# EAGLE board ms_auth_breakout (EAGLE 6.5.0)
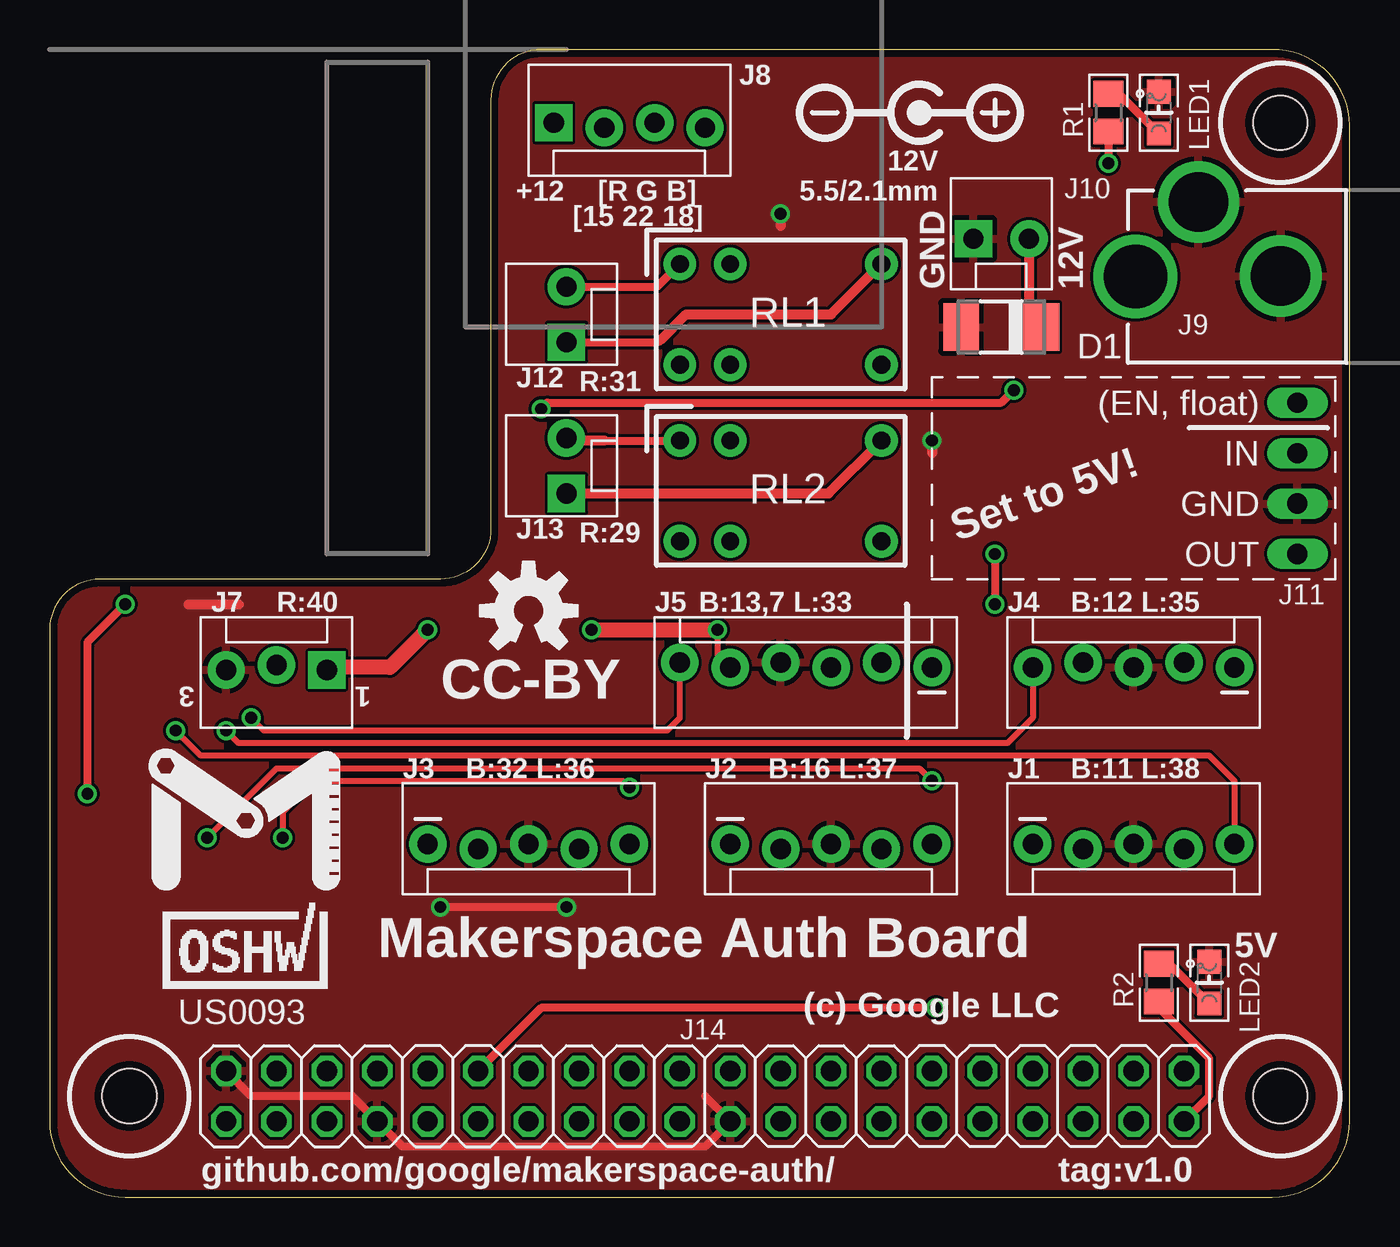
[diagram p0: board, top side]
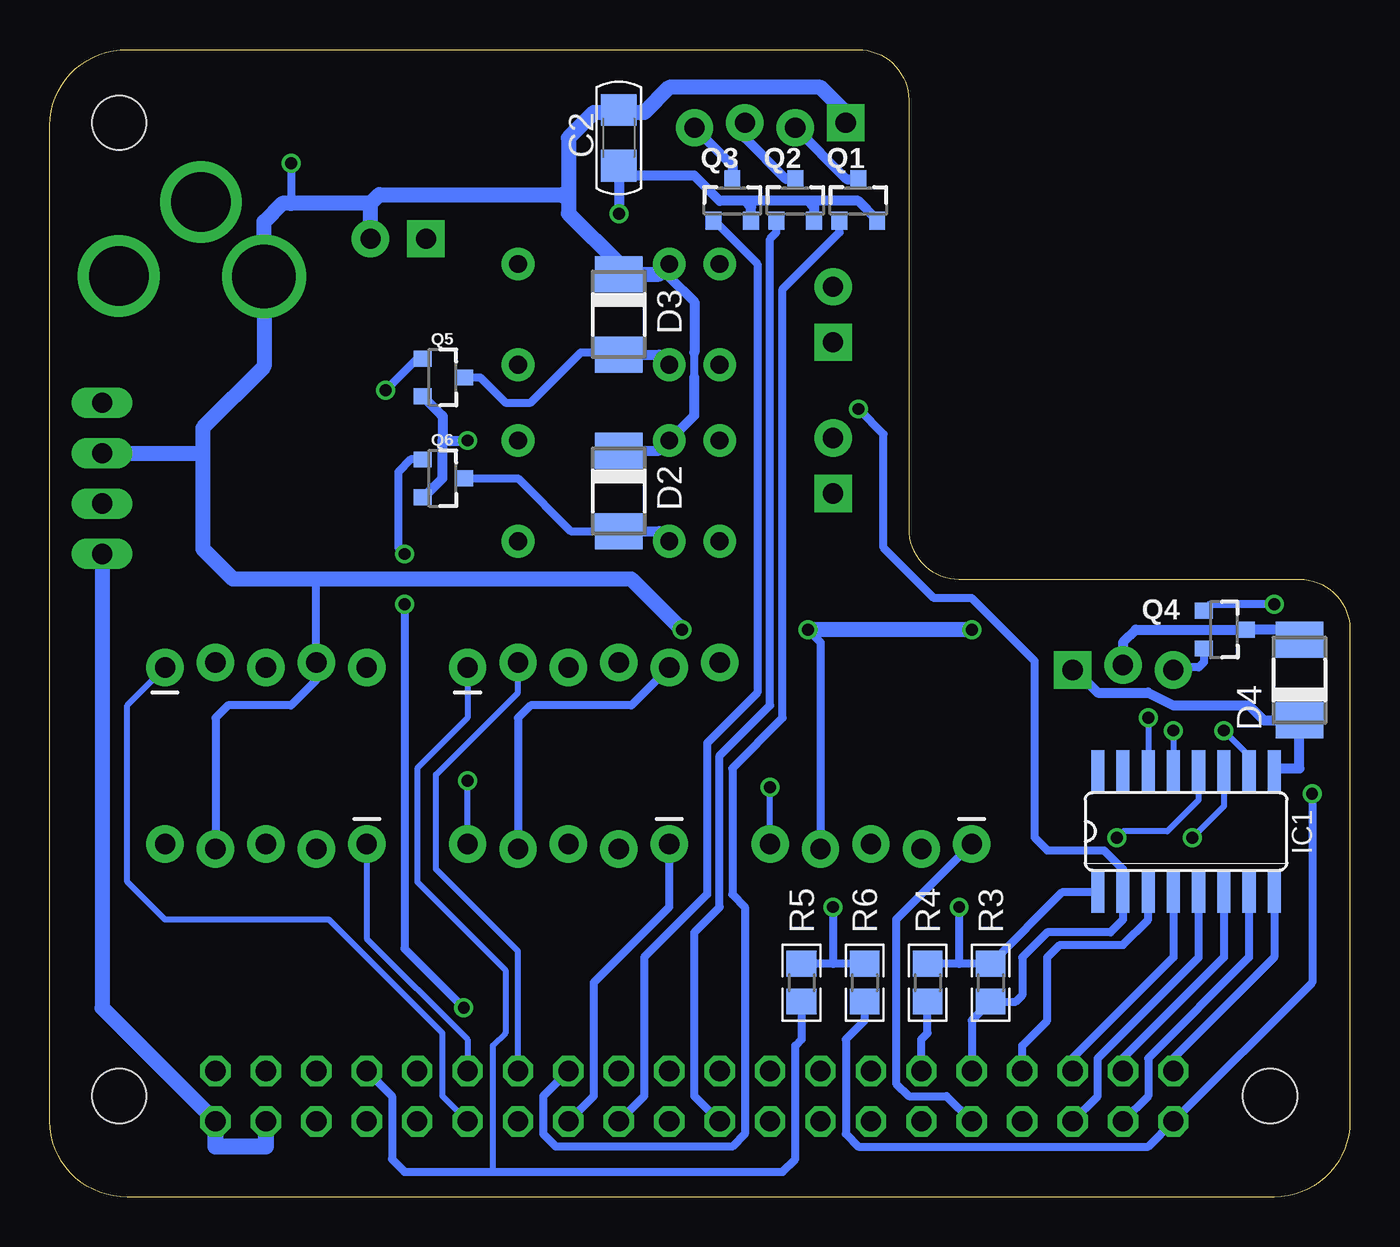
[diagram p1: board, bottom side, seen from below]

Size 65.51 x 57.78 mm. Coordinates in mm from the lower left corner, seen from the top.
Outline: 0,3.81 arc90 3.81,0 61.59,0 arc90 65.51,3.81 65.51,53.98 arc90 61.59,57.78 24.77,57.78 arc90 22.23,55.24 22.23,33.66 arc-90 19.68,31.11 2.54,31.11 arc90 0,28.57 0,3.81
Copper layers (1*16): Top 0.0356mm / dielectric 1.5011mm / Bottom 0.0356mm
Design rules "LaenPCBOrder": minimum track width 6mil, minimum drill 13mil, track to track 6mil, track to pad 6mil, pad to pad 6mil, via to via 6mil, smd to smd 6mil, copper to edge 15mil, drill to drill 6mil, minimum pad ring 7mil, minimum via ring 7mil, stop-mask expansion 4mil, vias tented up to drill 0mil, thermal gap 10mil
Holes 2.74 mm at 62,5.08 4.01,5.08 62,54.1

## Footprints (pad centres in the part's own frame; a part is rotated, then mirrored left to right if it is on the bottom)
C1206 = smd 1.6 x 1.8: 1 -1.4,0; 2 1.4,0
DO-214AC = smd 1.8 x 2.4: A 2.025,0; C -2.025,0
SO16 = smd 0.66 x 2.032: 1 -4.445,-3.073; 2 -3.175,-3.073; 3 -1.905,-3.073; 4 -0.635,-3.073; 5 0.635,-3.073; 6 1.905,-3.073; 7 3.175,-3.073; 8 4.445,-3.073; 9 4.445,3.073; 10 3.175,3.073; 11 1.905,3.073; 12 0.635,3.073; 13 -0.635,3.073; 14 -1.905,3.073; 15 -3.175,3.073; 16 -4.445,3.073
MOLEX-1X5_LOCK = drill 1.016 pad 1.88: 1 0,0; 2 2.54,-0.254; 3 5.08,0; 4 7.62,-0.254; 5 10.16,0
MOLEX-1X6_LOCK = drill 1.016 pad 1.88: 1 0,0; 2 2.54,-0.254; 3 5.08,0; 4 7.62,-0.254; 5 10.16,0; 6 12.7,-0.254
MOLEX-1X3_LOCK = drill 1.016 pad 1.88 square: 1 0,0.127 | drill 1.016 pad 1.88: 2 2.54,-0.127; 3 5.08,0.127
MOLEX-1X4_LOCK = drill 1.016 pad 1.88 square: 1 0,0.127 | drill 1.016 pad 1.88: 2 2.54,-0.127; 3 5.08,0.127; 4 7.62,-0.127
POWER_JACK_PTH_LOCK = drill 2.997 pad 4.115: GND 0.025,6.557; GNDBREAK 3.762,10.7 | drill 3.2 pad 4.115: PWR 0,13.878
MOLEX-1X2_LOCK = drill 1.016 pad 1.88 square: 1 -0.127,0 | drill 1.016 pad 1.88: 2 2.667,0
BUCK_HORIZONTAL = drill 1.016 long: EN 0,-5.08; GND 0,0; IN 0,-2.54; OUT 0,2.54
2X20 = drill 1.016 octagon: 1 -24.13,-1.27; 2 -24.13,1.27; 3 -21.59,-1.27; 4 -21.59,1.27; 5 -19.05,-1.27; 6 -19.05,1.27; 7 -16.51,-1.27; 8 -16.51,1.27; 9 -13.97,-1.27; 10 -13.97,1.27; 11 -11.43,-1.27; 12 -11.43,1.27; 13 -8.89,-1.27; 14 -8.89,1.27; 15 -6.35,-1.27; 16 -6.35,1.27; 17 -3.81,-1.27; 18 -3.81,1.27; 19 -1.27,-1.27; 20 -1.27,1.27; 21 1.27,-1.27; 22 1.27,1.27; 23 3.81,-1.27; 24 3.81,1.27; 25 6.35,-1.27; 26 6.35,1.27; 27 8.89,-1.27; 28 8.89,1.27; 29 11.43,-1.27; 30 11.43,1.27; 31 13.97,-1.27; 32 13.97,1.27; 33 16.51,-1.27; 34 16.51,1.27; 35 19.05,-1.27; 36 19.05,1.27; 37 21.59,-1.27; 38 21.59,1.27; 39 24.13,-1.27; 40 24.13,1.27
CHIPLED_0805 = smd 1.2 x 1.2: A 0,-1.05; C 0,1.05
SOT23-3 = smd 0.8 x 0.9: 1 -0.95,-1; 2 0.95,-1; 3 0,1.1
R0805 = smd 1.3 x 1.5: 1 -0.95,0; 2 0.95,0
HFD23 = drill 0.9 pad 1.651: 1 -5.08,2.54; 2 -2.54,2.54; 3 5.08,2.54; 4 5.08,-2.54; 5 -2.54,-2.54; 6 -5.08,-2.54

## Placement (x,y rotation side)
C2  47u  [C1206]  36.83,53.34 270 bottom
D1  [DO-214AC]  47.94,43.81 180 top
D2  [DO-214AC]  36.83,35.56 270 bottom
D3  [DO-214AC]  36.83,44.45 270 bottom
D4  [DO-214AC]  2.54,26.04 90 bottom
IC1  ULN2003AD  [SO16]  8.26,18.41 0 bottom
J1  [MOLEX-1X5_LOCK]  49.53,17.78 0 top
J2  [MOLEX-1X5_LOCK]  34.29,17.78 0 top
J3  [MOLEX-1X5_LOCK]  19.05,17.78 0 top
J4  [MOLEX-1X5_LOCK]  59.69,26.67 180 top
J5  [MOLEX-1X6_LOCK]  44.45,26.67 180 top
J7  [MOLEX-1X3_LOCK]  13.97,26.67 180 top
J8  [MOLEX-1X4_LOCK]  25.4,53.98 0 top
J9  POWER_JACKPTH_LOCK  [POWER_JACK_PTH_LOCK]  68.58,46.35 90 top
J10  [MOLEX-1X2_LOCK]  46.67,48.26 0 top
J11  BUCK_MODULEHORIZONTAL  [BUCK_HORIZONTAL]  62.87,34.92 180 top
J12  [MOLEX-1X2_LOCK]  26.04,43.18 90 top
J13  [MOLEX-1X2_LOCK]  26.04,35.56 90 top
J14  [2X20]  33.02,5.08 180 top
LED1  LED  [CHIPLED_0805]  55.88,54.61 0 top
LED2  LED  [CHIPLED_0805]  58.42,10.79 0 top
LOGO1  OSHW-LOGOM  [OSHW-LOGO-M]  24.13,29.53 0 top
Q1  DMN3023L  [SOT23-3]  24.77,50.16 0 bottom
Q2  DMN3023L  [SOT23-3]  27.94,50.16 0 bottom
Q3  DMN3023L  [SOT23-3]  31.11,50.16 0 bottom
Q4  DMN3023L  [SOT23-3]  6.35,28.57 270 bottom
Q5  DMN3023L  [SOT23-3]  45.72,41.27 270 bottom
Q6  DMN3023L  [SOT23-3]  45.72,36.2 270 bottom
R1  1k  [R0805]  53.34,54.61 270 top
R2  560  [R0805]  55.88,10.79 270 top
R3  10k  [R0805]  18.1,10.79 270 bottom
R4  10k  [R0805]  21.27,10.79 270 bottom
R5  10k  [R0805]  27.62,10.79 270 bottom
R6  10k  [R0805]  24.45,10.79 270 bottom
RL1  HFD23_SPDT  [HFD23]  36.83,44.45 0 top
RL2  HFD23_SPDT  [HFD23]  36.83,35.56 0 top
U$1  MS_LOGO  [MS_LOGO_VECTOR]  4.76,15.24 0 top
U$2  US0093  [CERT-SMALL-SILK]  9.84,10.48 0 top

## Library data of the parts
C2 = Tim-Pretty; MFN: Taiyo Yuden; MPN: EMK316BBJ476ML-T
D1-D4 = diode; MFN: Micro Commercial Co; MPN: SS14FL-TP
IC1 = uln-udn; MFN: Texas Instruments; MPN: ULN2003ADR
J1-J4 = SparkFun-Connectors; MFN: Molex; MPN: 22-23-2051
J5 = SparkFun-Connectors; MFN: Molex; MPN: 22-23-2061
J7 = SparkFun-Connectors; MFN: Molex; MPN: 22-23-2031; PROD_ID: CONN-08625; SF_ID: PRT-08096
J8 = SparkFun-Connectors; MFN: Molex; MPN: 22-23-2041; PROD_ID: CONN-08186; SF_ID: PRT-08231
J9 = SparkFun-Connectors; MFN: Wurth Electronics Inc; MPN: 694106301002; PROD_ID: CONN-08197; SF_ID: PRT-00119
J10 J12 J13 = SparkFun-Connectors; MFN: Molex; MPN: 22-23-2021; SF_ID: PRT-09918
J11 = buck-module
J14 = pinhead
LED1 LED2 = Tim-Pretty; MFN: LG; MPN: LG R971-KN-1
LOGO1 = SparkFun-Aesthetics
Q1-Q6 = SparkFun-DiscreteSemi; MFN: Diodes Incorporated; MPN: DMN3023L-7; PROD_ID: TRANS-12988
R1 = Tim-Pretty; MFN: Yaego; MPN: RC0805JR-071KL
R2 = Tim-Pretty; MFN: Yaego; MPN: RC0805JR-07560RL
R3-R6 = Tim-Pretty; MFN: Yaego; MPN: RC0805JR-0710KL
RL1 RL2 = hfd23; MFN: HF; MPN: HFD23/012-1ZS
U$1 = ms-logo
U$2 = OSHWA

## Nets
!B: J8.4 Q3.3
!G: J8.3 Q2.3
!L1: IC1.10 J1.5
!L2: IC1.11 J2.5
!L3: IC1.12 J3.5
!L4: IC1.13 J4.5
!L5: IC1.14 J5.6
!L6: IC1.15
!R: J8.2 Q1.3
+3V3: J14.1
+5V: J11.OUT J14.2 J14.4 R2.2
+12V: C2.1 D1.C D2.C D3.C D4.C IC1.9 J1.4 J2.4 J3.4 J4.4 J5.5 J7.1 J8.1 J9.PWR J10.2 J11.IN R1.2 RL1.2 RL2.2
B1_LOGIC: J1.1 J14.11
B2_LOGIC: J2.1 J14.16
B3_LOGIC: J3.1 J14.32
B4_LOGIC: J4.1 J14.12
B5_LOGIC: J5.2 J14.13
B6_LOGIC: J5.1 J14.7 R5.2
B_LOGIC: J14.18 Q3.1
G_LOGIC: J14.22 Q2.1
GND: C2.2 D1.A IC1.1 IC1.8 J1.3 J2.3 J3.3 J4.3 J5.4 J7.3 J9.GND J9.GNDBREAK J10.1 J11.GND J14.20 J14.34 J14.39 LED1.C LED2.C Q1.2 Q2.2 Q3.2 Q4.2 Q5.2 Q6.2 R3.1 R4.1 R5.1 R6.1
HC_LOGIC: J14.40 Q4.1 R6.2
L1_LOGIC: IC1.7 J14.38
L2_LOGIC: IC1.6 J14.37
L3_LOGIC: IC1.5 J14.36
L4_LOGIC: IC1.4 J14.35
L5_LOGIC: IC1.3 J14.33
L6_LOGIC: IC1.2 J14.31 Q5.1 R3.2
L7_LOGIC: J14.29 Q6.1 R4.2
N$2: D2.A Q6.3 RL2.5
N$4: D4.A J7.2 Q4.3
N$5: D3.A Q5.3 RL1.5
N$6: J12.2 RL1.1
N$7: LED2.A R2.1
N$9: J13.2 RL2.1
N$10: J12.1 RL1.3
N$11: LED1.A R1.1
N$12: J13.1 RL2.3
R_LOGIC: J14.15 Q1.1
RXD: J14.10
TXD: J14.8

## Tracks (layer width: path | path; a pad name or v marks a point on that pad's centre or on a via)
!B
  Bottom 0.508: J8.4 31.11,51.94 Q3.3
!G
  Bottom 0.508: Q2.3 28.41,51.27 30.48,53.34 J8.3
!L1  (via drill 0.6)
  Top 0.305: J1.5 59.69,20.95 58.42,22.23 7.62,22.23 v6.35,23.5
  Bottom 0.305: v6.35,23.5 5.08,22.23 IC1.10
!L2  (via drill 0.6)
  Top 0.305: v44.45,20.95 43.81,21.59 11.43,21.59 v7.94,18.1
  Bottom 0.305: J2.5 v44.45,20.95 | IC1.11 6.35,19.68 v7.94,18.1
!L3  (via drill 0.6)
  Top 0.305: v29.21,20.64 28.89,20.95 13.34,20.95 11.75,19.37 v11.75,18.1
  Bottom 0.305: J3.5 v29.21,20.64 | IC1.12 7.62,20 9.21,18.41 11.43,18.41 v11.75,18.1
!L4  (via drill 0.6)
  Top 0.305: J4.5 49.53,24.13 48.26,22.86 9.53,22.86 v8.89,23.5
  Bottom 0.305: v8.89,23.5 IC1.13
!L5  (via drill 0.6)
  Top 0.305: v10.16,24.13 10.79,23.5 31.11,23.5 31.75,24.13 J5.6
  Bottom 0.305: v10.16,24.13 IC1.14
!R
  Bottom 0.508: J8.2 25.36,51.27 Q1.3
+5V
  Top 0.406: J14.2 58.42,5.08 58.42,6.99 55.88,9.53 R2.2
  Bottom 0.762: J14.2 62.87,9.53 J11.OUT
  Bottom 0.813: J14.2 57.15,2.54 54.61,2.54 J14.4
+12V  (via drill 0.6)
  Top 0.305: v33.65,28.57 33.65,27.3 J5.5
  Top 0.406: 14.1,26.67 J7.1 | R1.2 v53.34,52.07
  Top 0.508: J10.2 49.34,44.44 D1.C
  Top 0.762: v27.3,28.57 v33.65,28.57 | v19.05,28.57 17.14,26.67 14.1,26.67
  Bottom 0.305: 34.92,26.04 J5.5
  Bottom 0.406: J1.4 57.15,24.13 56.51,24.77 53.34,24.77 52.07,26.04 J4.4 52.07,31.11 | 34.92,26.04 36.2,24.77 41.27,24.77 41.91,24.13 J2.4 | J7.1 13.84,26.54 | J3.4 26.67,27.94 v27.3,28.57 | 33.02,41.27 33.02,42.55 | 33.65,28.89 v33.65,28.57 | v53.34,52.07 53.34,50.04
  Bottom 0.508: 13.84,26.54 12.7,25.4 10.16,25.4 8.89,24.77 5.08,24.77 4.32,24.01 D4.C 2.54,21.59 3.71,21.59 IC1.9 | 36.7,54.61 C2.1 | 36.83,46.99 D3.C | D2.C 34.8,37.59 RL2.2 33.02,39.37 33.02,41.27 | RL1.2 34.29,46.35 33.02,45.09 33.02,42.55
  Bottom 0.762: 57.78,37.47 57.78,38.73 54.7,41.82 J9.PWR 54.7,49.12 53.78,50.04 53.34,50.04 49.34,50.04 | 57.78,37.47 57.78,32.64 56.26,31.11 52.07,31.11 36.2,31.11 v33.65,28.57 | v19.05,28.57 v27.3,28.57 | J11.IN 57.78,37.47 | J8.1 25.4,54.61 26.67,55.88 34.29,55.88 35.56,54.61 36.7,54.61 38.1,54.61 39.37,53.34 39.37,50.16 | 39.37,50.16 39.37,49.53 36.83,46.99 | D3.C 34.8,46.48 RL1.2 | J10.2 49.34,50.04 | 49.34,50.04 48.89,50.48 39.69,50.48 39.37,50.16
B1_LOGIC
  Bottom 0.305: J1.1 49.53,13.02 44.45,7.94 J14.11
B2_LOGIC
  Bottom 0.406: J14.16 38.1,5.08 38.1,10.79 34.29,14.61 J2.1
B3_LOGIC
  Bottom 0.406: J14.32 20.32,5.08 22.23,5.08 22.86,5.71 22.86,13.97 J3.1
B4_LOGIC
  Bottom 0.305: J14.12 45.72,5.08 45.72,8.26 51.43,13.97 59.69,13.97 61.59,15.88 61.59,24.77 J4.1
B5_LOGIC
  Bottom 0.305: J14.13 41.91,12.38 46.04,16.51 46.04,21.27 41.91,25.4 J5.2 41.91,26.67
B6_LOGIC
  Bottom 0.305: J5.1 44.45,24.13 46.99,21.59 46.99,15.88 42.54,11.43 42.54,8.26 43.18,7.62 43.18,1.27
  Bottom 0.406: J14.7 48.26,5.08 48.26,1.91 47.62,1.27 43.18,1.27 28.57,1.27 27.94,1.91 27.94,7.62 27.62,7.94 R5.2
B_LOGIC
  Bottom 0.406: J14.18 35.56,5.08 35.56,12.06 32.38,15.24 32.38,22.86 29.84,25.4 29.84,46.99 32.02,49.16 Q3.1
G_LOGIC
  Bottom 0.406: J14.22 33.02,5.08 33.02,13.34 31.75,14.61 31.75,22.23 29.21,24.77 29.21,48.26 28.89,48.58 Q2.1
GND  (via drill 0.6)
  Top 0.406: J14.39 10.16,5.08 15.24,5.08 J14.34 17.78,2.54 33.02,2.54 J14.20 33.02,5.08 | v26.04,14.61 v19.68,14.61
  Top 0.508: 6.99,29.84 9.53,29.84 | v36.83,49.53 36.83,48.9 | v44.45,38.1 44.45,37.47
  Bottom 0.406: IC1.8 3.81,12.06 8.89,6.99 J14.39 | Q4.2 7.35,26.94 7.62,26.67 8.76,26.67 J7.3 | R3.1 19.68,11.74 | 19.68,11.74 R4.1 | R6.1 26.04,11.74 | 26.04,11.74 R5.1 | 18.41,12.06 R3.1 | v26.04,14.61 26.04,11.74 | v19.68,14.61 19.68,11.74 | IC1.1 14.5,15.34 R3.1
  Bottom 0.508: Q1.2 23.82,49.22 24.77,50.16 27.3,50.16 | 27.3,50.16 30.48,50.16 | 30.48,50.16 31.75,50.16 33.02,51.44 36.32,51.44 C2.2 v36.83,49.53 | Q3.2 30.16,49.85 30.48,50.16 | 27.3,50.16 26.99,49.85 Q2.2 | Q6.2 46.67,35.24 45.72,36.2 45.72,38.1 | Q5.2 45.76,39.37 45.72,39.37 45.72,38.1 | 45.72,38.1 v44.45,38.1
  pour Top: 24.13,58.42 65.41,58.42 65.41,0 -0.64,0 -0.64,31.11
HC_LOGIC  (via drill 0.6)
  Top 0.406: v3.81,29.84 1.9,27.94 v1.9,20.32
  Bottom 0.406: v3.81,29.84 7.03,29.84 Q4.1 | v1.9,20.32 1.9,10.79 J14.40 10.16,2.54 24.77,2.54 25.4,3.17 25.4,7.94 24.45,8.89 R6.2
L1_LOGIC
  Bottom 0.406: IC1.7 5.08,12.06 10.16,6.99 10.16,5.08 J14.38
L2_LOGIC
  Bottom 0.406: IC1.6 6.35,12.06 11.43,6.99 J14.37
L3_LOGIC
  Bottom 0.406: J14.36 12.7,5.08 12.7,6.99 7.62,12.06 IC1.5
L4_LOGIC
  Bottom 0.406: IC1.4 8.89,12.06 13.97,6.99 J14.35
L5_LOGIC
  Bottom 0.406: IC1.3 10.16,13.97 11.43,12.7 14.61,12.7 15.24,12.06 15.24,8.89 16.51,7.62 J14.33
L6_LOGIC  (via drill 0.6)
  Top 0.406: v48.58,40.64 47.94,40.01 25.08,40.01 v24.77,39.69
  Bottom 0.406: J14.31 19.05,8.89 R3.2 16.83,9.84 16.51,10.16 16.51,12.06 15.24,13.34 12.07,13.34 11.43,13.97 IC1.2 11.43,16.51 12.38,17.46 15.24,17.46 15.88,18.1 15.88,26.99 19.05,30.16 20.96,30.16 23.5,32.7 23.5,38.42 v24.77,39.69 | Q5.1 46.99,42.23 v48.58,40.64
L7_LOGIC  (via drill 0.6)
  Top 0.406: v47.62,32.38 v47.62,29.84 | v44.64,9.53 24.77,9.53 J14.29
  Bottom 0.406: J14.29 21.59,7.94 21.27,8.26 R4.2 | Q6.1 47.31,37.15 47.94,36.51 47.94,32.7 v47.62,32.38 | v44.64,9.53 47.62,12.51 v47.62,29.84
N$1
  cutout Top: 16.51,23.5 16.51,20.95 29.21,20.95 29.21,23.5
N$2
  Bottom 0.406: 44.57,36.15 Q6.3 41.91,36.2 39.25,33.53 D2.A
  Bottom 0.508: D2.A 34.8,33.53 RL2.5
N$4
  Bottom 0.406: Q4.3 3.49,28.57 3.3,28.38
  Bottom 0.508: J7.2 11.43,27.94 10.79,28.57 Q4.3 3.06,28.57 D4.A
N$5
  Bottom 0.406: 44.57,41.23 Q5.3 43.81,41.27 42.54,40.01 41.27,40.01 38.73,42.55 36.95,42.55 D3.A
  Bottom 0.508: D3.A 34.8,42.42 RL1.5
N$6
  Top 0.406: J12.2 30.61,45.85 RL1.1
  Top 0.508: RL1.1 31.5,46.99
N$7
  Top 0.406: R2.1 56.52,11.64 LED2.A
N$9
  Top 0.406: 27.94,38.1 RL2.1
  Top 0.508: RL2.1 31.5,38.1 | 27.94,38.1 26.16,38.1 J13.2
N$10
  Top 0.406: J12.1 30.67,43.05 30.8,43.18
  Top 0.508: RL1.3 39.37,44.45 32.07,44.45 30.8,43.18 | 26.04,43.18 J12.1
N$11
  Top 0.406: R1.1 53.98,55.46 LED1.A
N$12
  Top 0.508: J13.1 39.24,35.43 RL2.3
R_LOGIC
  Bottom 0.406: J14.15 40.64,5.08 40.64,3.17 40,2.54 31.11,2.54 30.48,3.17 30.48,14.61 31.11,15.24 31.11,21.59 28.57,24.13 28.57,45.72 25.71,48.58 Q1.1

## Text on the board
tPlace: +12 | [R G B] | 12V / 5.5/2.1mm | [15 22 18] | GND | 12V | R:31 | R:29 | Set to 5V! | R:40 | B:13,7 L:33 | B:12 L:35 | 3 | 1 | CC-BY | B:32 L:36 | B:16 L:37 | B:11 L:38 | Makerspace Auth Board | 5V | (c) Google LLC | github.com/google/makerspace-auth/ | tag:v1.0
tNames: J11
tDocu: (HDMI) | (CSI bus)